# EAGLE board thermocouple (EAGLE 4.16)
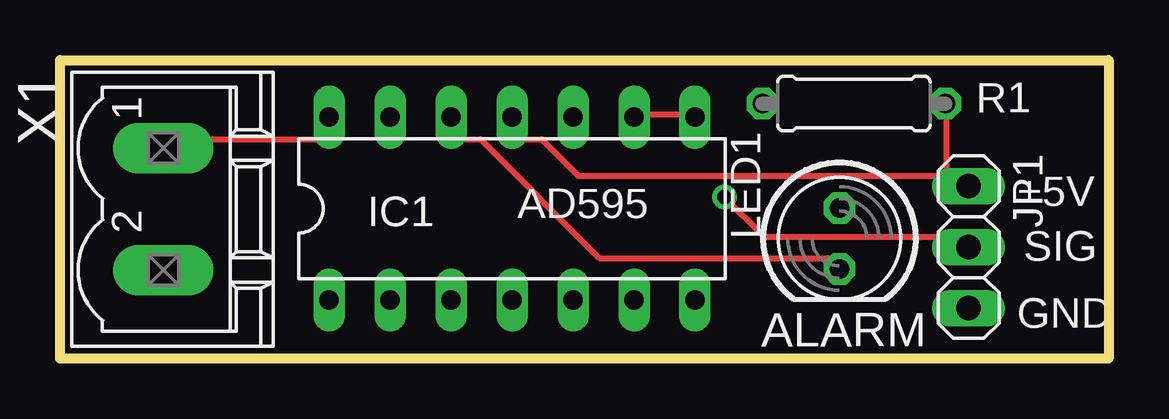
[diagram p0: board, top side]
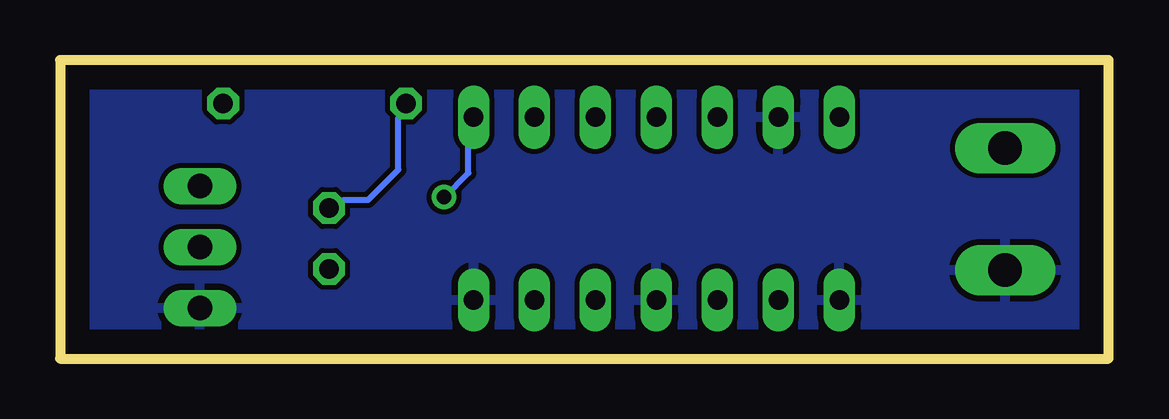
[diagram p1: board, bottom side, seen from below]

Size 43.69 x 12.45 mm. Coordinates in mm from the lower left corner, seen from the top.
Outline: 0,12.45 43.69,12.45 43.69,0 0,0 0,12.45
Copper layers (1*16): Top 0.035mm / dielectric 1.5mm / Bottom 0.035mm
Design rules "default": minimum track width 10mil, minimum drill 24mil, track to track 8mil, track to pad 8mil, pad to pad 8mil, via to via 8mil, smd to smd 8mil, copper to edge 40mil, drill to drill 8mil, minimum pad ring 10mil, minimum via ring 8mil, stop-mask expansion 4mil, vias tented up to drill 0mil, thermal gap 10mil

## Footprints (pad centres in the part's own frame; a part is rotated, then mirrored left to right if it is on the bottom)
DIL14 = drill 0.813 long: 1 -7.62,-3.81; 2 -5.08,-3.81; 3 -2.54,-3.81; 4 0,-3.81; 5 2.54,-3.81; 6 5.08,-3.81; 7 7.62,-3.81; 8 7.62,3.81; 9 5.08,3.81; 10 2.54,3.81; 11 0,3.81; 12 -2.54,3.81; 13 -5.08,3.81; 14 -7.62,3.81
1X03 = drill 1.016 long: 1 -2.54,0; 2 0,0; 3 2.54,0
LED5MM = drill 0.813 octagon: A -1.27,0; K 1.27,0
0207/7 = drill 0.813 octagon: 1 -3.81,0; 2 3.81,0
MSTBV2 = drill 1.397 long: 1 -2.54,0; 2 2.54,0

## Placement (x,y rotation side)
IC1  [DIL14]  18.84,6.25 0 top
JP1  [1X03]  37.86,4.65 270 top
LED1  [LED5MM]  32.48,5.01 270 top
R1  220  [0207/7]  33.08,10.63 0 top
X1  MST2V  [MSTBV2]  4.31,6.23 270 top

## Library data of the parts
IC1 = analog-devices
JP1 = pinhead
LED1 = led
R1 = rcl
X1 = con-phoenix-508

## Nets
GND: IC1.1 IC1.4 IC1.7 IC1.13 JP1.3 X1.2
N$1: LED1.A R1.1
N$2: IC1.12 LED1.K
N$3: IC1.14 X1.1
N$5: IC1.8 IC1.9 JP1.2
VCC: IC1.11 JP1.1 R1.2

## Tracks (layer width: path | path; a pad name or v marks a point on that pad's centre or on a via)
GND
  pour Bottom: -1.27,13.72 44.96,13.72 44.96,-1.78 -1.27,-1.78
N$1
  Bottom 0.254: LED1.A 31.88,6.6 30.86,6.6 29.59,7.87 29.59,10.03 R1.1
N$2
  Top 0.254: IC1.12 16.89,9.14 17.53,9.14 22.48,4.19 32,4.19 LED1.K
N$3
  Top 0.254: IC1.14 10.67,9.14 6.35,9.14 X1.1
N$5  (via drill 0.61)
  Top 0.254: IC1.9 24.51,10.16 25.91,10.16 IC1.8 | v27.69,6.73 29.34,5.08 36.45,5.08 JP1.2
  Bottom 0.254: v27.69,6.73 26.67,7.75 26.67,8.76 IC1.8
VCC
  Top 0.254: IC1.11 19.43,9.14 20.07,9.14 21.59,7.62 36.45,7.62 JP1.1 36.96,7.87 36.96,10.03 R1.2

## Text on the board
tPlace: AD595 | +5V | SIG | GND | ALARM